# EAGLE board main_V3 (EAGLE 8.5.1)

Size 50.47 x 31.74 mm. Coordinates in mm from the lower left corner, seen from the top.
Outline: 0,0 50.47,0 50.47,31.74 0,31.74 0,0
Copper layers ((1*2)+(15*16)): Top 0.035mm / dielectric 1.5mm / Route2 0.035mm / dielectric 0.15mm / Route15 0.035mm / dielectric 0.2mm / Bottom 0.035mm
Design rules "default *": minimum track width 16mil, minimum drill 0.35mm, track to track 6mil, track to pad 6mil, pad to pad 6mil, via to via 6mil, smd to smd 6mil, copper to edge 40mil, drill to drill 6mil, minimum pad ring 10mil, minimum via ring 8mil, stop-mask expansion 4mil, vias tented up to drill 0mil, thermal gap 10mil

## Footprints (pad centres in the part's own frame; a part is rotated, then mirrored left to right if it is on the bottom)
DBS = smd 1.7 x 1.9: + -2.55,-4.5; - 2.55,-4.5; AC1 -2.55,4.5; AC2 2.55,4.5
C1206K = smd 1.5 x 2: 1 -1.5,0; 2 1.5,0
SOT23 = smd 1 x 1.4: 1 -0.95,-1.1; 2 0.95,-1.1; 3 0,1.1
SMADIODE = smd 2.54 x 2.54: A 2.349,0; C -2.349,0
SOT223 = smd 1.499 x 2.007: 1 -2.261,-3.15; 2 0.025,-3.15; 3 2.311,-3.15 | smd 3.81 x 2.007: 4 0,3.15
1206 = smd 1.6 x 1.803: A -1.422,0; C 1.422,0
SO8P = smd 0.61 x 2.21: 1 -1.905,-2.616; 2 -0.635,-2.616; 3 0.635,-2.616; 4 1.905,-2.616; 5 1.905,2.616; 6 0.635,2.616; 7 -0.635,2.616; 8 -1.905,2.616
5-2,5 = smd 2.54 x 5.08: 1 0,0
SMD1,27-2,54 = smd 1.27 x 2.54: 1 0,0
CSM-7X-DU = smd 5.5 x 2: 1 -4.75,0; 2 4.75,0
SOT23-3 = smd 0.8 x 0.9: 1 -0.95,-1; 2 0.95,-1; 3 0,1.1
1206' = smd 1.6 x 1.8: 1 -1.4,0; 2 1.4,0
ESP8266-ESP12E = smd 2 x 1.2: 1 -7.62,5.84; 2 -7.62,3.84; 3 -7.62,1.84; 4 -7.62,-0.16; 5 -7.62,-2.16; 6 -7.62,-4.16; 7 -7.62,-6.16; 8 -7.62,-8.16; 9 8.58,-8.16; 10 8.58,-6.16; 11 8.58,-4.16; 12 8.58,-2.16; 13 8.58,-0.16; 14 8.58,1.84; 15 8.58,3.84; 16 8.58,5.84 | smd 1.2 x 2: 17 -4.62,-10.16; 18 -2.62,-10.16; 19 -0.62,-10.16; 20 1.38,-10.16; 21 3.38,-10.16; 22 5.38,-10.16
SOT23-BEC = smd 1 x 1.4: B -0.95,-1.1; C 0,1.1; E 0.95,-1.1
TQFP32-08 = smd 1.27 x 0.559: 1 -4.293,2.8; 2 -4.293,2; 3 -4.293,1.2; 4 -4.293,0.4; 5 -4.293,-0.4; 6 -4.293,-1.2; 7 -4.293,-2; 8 -4.293,-2.8; 17 4.293,-2.8; 18 4.293,-2; 19 4.293,-1.2; 20 4.293,-0.4; 21 4.293,0.4; 22 4.293,1.2; 23 4.293,2; 24 4.293,2.8 | smd 0.559 x 1.27: 9 -2.8,-4.293; 10 -2,-4.293; 11 -1.2,-4.293; 12 -0.4,-4.293; 13 0.4,-4.293; 14 1.2,-4.293; 15 2,-4.293; 16 2.8,-4.293; 25 2.8,4.293; 26 2,4.293; 27 1.2,4.293; 28 0.4,4.293; 29 -0.4,4.293; 30 -1.2,4.293; 31 -2,4.293; 32 -2.8,4.293
SOIC16 = smd 0.635 x 1.524: 1 -4.445,-2.695; 2 -3.175,-2.695; 3 -1.905,-2.695; 4 -0.635,-2.695; 5 0.635,-2.695; 6 1.905,-2.695; 7 3.175,-2.695; 8 4.445,-2.695; 9 4.445,2.695; 10 3.175,2.695; 11 1.905,2.695; 12 0.635,2.695; 13 -0.635,2.695; 14 -1.905,2.695; 15 -3.175,2.695; 16 -4.445,2.695
47589-0001 = smd 1.35 x 0.4: 1 2.8,1.3; 2 2.8,0.65; 3 2.8,0; 4 2.8,-0.65; 5 2.8,-1.3 | smd 1.27 x 2.54: P$1 0,3.81; P$2 0,-3.81

## Placement (x,y rotation side)
B1  DBS107G  [DBS]  35.56,12.7 90 bottom
C1  100nf  [C1206K]  45.09,15.88 0 bottom
C2  100nf  [C1206K]  43.81,3.17 270 bottom
C3  100nf  [C1206K]  38.1,25.4 0 bottom
C4  22pf  [C1206K]  37.47,10.79 90 top
C5  22pf  [C1206K]  37.47,15.88 270 top
C6  100nf  [C1206K]  40.01,12.7 270 top
C7  22pf  [C1206K]  11.43,6.98 90 bottom
C8  22pf  [C1206K]  9.53,20.32 180 bottom
C9  100f  [C1206K]  24.77,11.43 0 bottom
C10  100nf  [C1206K]  3.49,1.59 180 top
C11  100nf  [C1206K]  4.45,22.86 270 bottom
C12  10uf  [C1206K]  4.45,28.57 270 bottom
C13  10uf  [C1206K]  26.03,1.91 0 bottom
C14  10uf  [C1206K]  24.77,13.97 0 bottom
C15  10uf  [C1206K]  33.02,8.89 0 top
C17  10uf  [C1206K]  21.59,24.77 270 bottom
D1  6v2  [SOT23]  38.1,21.59 90 bottom
D2  [SMADIODE]  33.66,2.54 0 top
IC1  1117-adj  [SOT223]  45.72,10.79 90 bottom
IC2  1117-3v3  [SOT223]  45.72,22.86 90 bottom
IC3  1117-5v  [SOT223]  8.89,26.04 0 bottom
IC4  1117-5v  [SOT223]  26.67,6.35 90 bottom
IC5  1117-3v3  [SOT223]  27.31,19.05 90 bottom
IC6  1117-5v  [SOT223]  27.31,26.04 90 bottom
LED1  [1206]  38.1,28.57 0 bottom
LED2  [1206]  32.39,6.35 180 top
LED3  [1206]  40.01,26.04 180 top
M1  [SO8P]  15.88,24.13 180 bottom
PAD1  [5-2,5]  47.62,27.94 0 bottom
PAD2  [5-2,5]  33.66,27.94 180 bottom
PAD3  [SMD1,27-2,54]  13.97,1.91 0 bottom
PAD4  [5-2,5]  36.83,3.81 180 bottom
PAD5  [5-2,5]  40.64,3.81 180 bottom
PAD6  [5-2,5]  33.02,3.81 180 bottom
PAD7  [SMD1,27-2,54]  2.54,23.5 90 top
PAD8  [SMD1,27-2,54]  2.54,13.97 90 top
PAD9  [SMD1,27-2,54]  2.54,12.06 90 top
PAD10  [SMD1,27-2,54]  2.54,10.16 90 top
PAD11  [SMD1,27-2,54]  2.54,8.26 90 top
PAD12  [SMD1,27-2,54]  2.54,19.68 90 top
PAD13  [SMD1,27-2,54]  2.54,21.59 90 top
PAD14  [SMD1,27-2,54]  2.54,15.88 90 top
PAD15  [SMD1,27-2,54]  2.54,17.78 90 top
PAD16  [SMD1,27-2,54]  2.54,6.35 90 top
PAD17  [SMD1,27-2,54]  2.54,4.45 90 top
PAD18  [SMD1,27-2,54]  13.97,29.84 180 bottom
PAD19  [SMD1,27-2,54]  12.07,29.84 180 bottom
PAD20  [SMD1,27-2,54]  21.59,29.84 0 bottom
PAD21  [SMD1,27-2,54]  19.69,29.84 0 bottom
PAD22  [SMD1,27-2,54]  17.78,29.84 0 bottom
PAD23  [SMD1,27-2,54]  12.07,1.91 0 bottom
PAD24  [SMD1,27-2,54]  10.16,1.91 0 bottom
PAD25  [SMD1,27-2,54]  8.26,1.91 0 bottom
PAD26  [SMD1,27-2,54]  6.35,1.91 0 bottom
PAD27  [SMD1,27-2,54]  4.45,1.91 0 bottom
PAD28  [SMD1,27-2,54]  1.91,27.94 270 bottom
PAD29  [SMD1,27-2,54]  1.91,29.84 270 bottom
PAD30  [SMD1,27-2,54]  1.91,1.27 90 bottom
PAD31  [SMD1,27-2,54]  1.91,3.17 90 bottom
PAD32  [SMD1,27-2,54]  1.91,5.08 90 bottom
PAD33  [SMD1,27-2,54]  1.91,6.98 90 bottom
PAD34  [SMD1,27-2,54]  1.91,8.89 90 bottom
PAD37  [SMD1,27-2,54]  1.91,14.61 270 bottom
PAD38  [SMD1,27-2,54]  1.91,16.51 270 bottom
PAD40  [SMD1,27-2,54]  1.91,20.32 270 bottom
PAD41  [SMD1,27-2,54]  1.91,22.22 270 bottom
PAD42  [SMD1,27-2,54]  1.91,24.13 270 bottom
PAD43  [SMD1,27-2,54]  1.91,26.04 270 bottom
Q1  12Mhz  [CSM-7X-DU]  33.02,18.41 90 top
Q2  [SOT23-3]  20.32,2.54 0 bottom
Q3  16Mhz  [CSM-7X-DU]  7.62,11.43 90 bottom
Q4  [SOT23-3]  16.51,2.54 0 bottom
R1  10K  [1206']  26.67,19.68 0 top
R2  10K  [1206']  26.67,22.22 0 top
R3  10K  [1206']  26.67,1.91 0 top
R4  10K  [1206']  26.67,6.98 0 top
R5  10  [1206']  48.9,3.17 270 bottom
R6  1K  [1206']  45.09,18.41 0 bottom
R7  1K  [1206']  43.18,28.57 0 bottom
R8  10  [1206']  46.36,3.17 270 bottom
R9  10K  [1206']  26.67,4.45 180 top
R10  10K  [1206']  42.55,19.68 180 top
R11  10K  [1206']  13.97,6.98 270 bottom
R12  1K  [1206']  37.47,6.35 180 top
R13  10K  [1206']  42.55,22.22 0 top
R14  470  [1206']  26.67,17.14 0 top
R15  470  [1206']  26.67,14.61 0 top
R16  10K  [1206']  26.67,12.06 0 top
R17  10K  [1206']  16.51,6.98 90 bottom
R18  10K  [1206']  26.67,9.53 0 top
R19  10K  [1206']  19.05,6.98 90 bottom
R20  10K  [1206']  26.67,24.77 0 top
R21  10K  [1206']  3.18,26.67 0 top
R22  1K  [1206']  46.36,26.04 180 top
SJR1  [ESP8266-ESP12E]  13.97,12.7 0 top
T1  [SOT23-BEC]  47.62,20.95 0 top
T2  [SOT23-BEC]  37.47,20.95 0 top
U1  ATMEGA328P_TQFP  [TQFP32-08]  15.88,14.61 180 bottom
U$1  CH340G  [SOIC16]  45.09,12.7 270 top
U$2  MICRO-USB  [47589-0001]  44.2,3.17 90 top

## Library data of the parts
B1 = rectifier
C1-C15 C17 = rcl; SPICEPREFIX: C
D1 = diode
D2 LED1-LED3 = adafruit
IC1-IC6 = burr-brown; MPN: REG1117; OC_FARNELL: 1097566; OC_NEWARK: 14P6981
M1 = FaBo-Motor
PAD1-PAD34 PAD37 PAD38 PAD40-PAD43 = wirepad
Q1 Q3 = crystal; OC_FARNELL: unknown; OC_NEWARK: unknown
Q2 Q4 = SparkFun-DiscreteSemi; PROD_ID: TRANS-00830
R1-R22 = SparkFun
SJR1 = esp12e
T1 T2 = DC_LOAD_AU
U1 = SparkFun-IC-Microcontroller; PROD_ID: IC-09069
U$1 = ch340g
U$2 = con-molex-usb

## Nets
0: PAD30.1 U1.30
1: PAD31.1 U1.31
2: PAD32.1 U1.32
3: PAD33.1 U1.1
3V3: C10.1 C14.1 IC5.2 Q2.1 Q4.1 R1.1 R2.1 R4.2 R9.1 R16.2 R18.2 SJR1.8
4: PAD34.1 U1.2
5_REVERSE: M1.7 U1.9
5V: C9.1 C13.1 D2.C IC4.2 R11.2 R17.1 R19.1 U1.4 U1.6 U1.18 U$1.16
5V_M: C11.1 C12.1 IC3.2 M1.2 M1.3
5V_S: C17.1 IC6.2 PAD20.1
6_FORWARD: M1.6 U1.10
7: PAD37.1 U1.11
8: PAD38.1 U1.12
9_SERVO: PAD22.1 U1.13
10: PAD40.1 U1.14
11: PAD41.1 U1.15
12: PAD42.1 U1.16
13: PAD43.1 U1.17
+12V: C3.1 IC2.3 PAD1.1 R7.1 R22.1
-12V: B1.AC2 C1.2 C2.2 C3.2 D1.1 LED1.C LED3.C PAD2.1
-VBAT: B1.- PAD5.1
A0: PAD3.1 U1.23
A1: PAD23.1 U1.24
A2: PAD24.1 U1.25
A3: PAD25.1 U1.26
A6: PAD28.1 U1.19
A7: PAD29.1 U1.22
ADC: PAD7.1 R21.1
D+: U$1.5 U$2.3
D-: U$1.6 U$2.2
DTR: R10.2 T2.E U$1.13
E_0: PAD8.1 SJR1.4
E_2: PAD11.1 SJR1.7
E_3: PAD10.1 SJR1.6
E_5: PAD9.1 SJR1.5
E_8: PAD16.1 R3.1 SJR1.10
E_ADC: R20.1 R21.2 SJR1.2
GND: C4.2 C5.2 C6.2 C7.2 C8.2 C9.2 C10.2 C11.2 C12.2 C13.2 C14.2 C15.1 C17.2 IC3.1 IC4.1 IC5.1 IC6.1 LED2.C M1.5 M1.8 PAD6.1 PAD17.1 PAD21.1 R3.2 R20.2 SJR1.9 U1.3 U1.5 U1.21 U$1.1 U$2.5 U$2.P$2
IO0: R4.1 SJR1.12 T2.C
IO2: R9.2 SJR1.11
M+: M1.1 PAD18.1
M-: M1.4 PAD19.1
N$1: C7.1 Q3.1 U1.8
N$2: R2.2 SJR1.3
N$3: D1.3 IC2.1 R6.2
N$5: B1.AC1 C2.1 IC1.1 R5.2 R8.2
N$6: IC1.2 R5.1 R8.1
N$7: C1.1 IC1.3 IC2.2 R6.1
N$13: C4.1 Q1.1 U$1.8
N$14: C5.1 Q1.2 U$1.7
N$15: R10.1 T1.B
N$16: C8.1 Q3.2 U1.7
N$17: LED1.A R7.2
N$18: R13.1 T2.B
N$19: R15.2 U$1.3
N$20: R14.2 U$1.2
N$21: R11.1 U1.29
N$22: LED2.A R12.2
N$23: LED3.A R22.2
NRST: R1.2 SJR1.1 T1.C
RTS: R13.2 T1.E U$1.14
RX: PAD12.1 R14.1 SJR1.15
SCL3: PAD15.1 Q4.2 R16.1 SJR1.14
SCL5: PAD27.1 Q4.3 R17.2 U1.28
SDA3: PAD14.1 Q2.2 R18.1 SJR1.13
SDA5: PAD26.1 Q2.3 R19.2 U1.27
TX: PAD13.1 R15.1 SJR1.16
V3: C6.1 U$1.4
VBAT: B1.+ IC3.3 IC4.3 IC5.3 IC6.3 PAD4.1
VCC: C15.2 D2.A R12.1 U$2.1

## Tracks (layer width: path | path; a pad name or v marks a point on that pad's centre or on a via)
0  (1 unrouted)
1  (1 unrouted)
2  (1 unrouted)
3  (1 unrouted)
3V3  (11 unrouted)
4  (1 unrouted)
5_REVERSE  (1 unrouted)
5V  (10 unrouted)
5V_M  (4 unrouted)
5V_S  (2 unrouted)
6_FORWARD  (1 unrouted)
7  (1 unrouted)
8  (1 unrouted)
9_SERVO  (1 unrouted)
10  (1 unrouted)
11  (1 unrouted)
12  (1 unrouted)
13  (1 unrouted)
+12V  (4 unrouted)
-12V  (7 unrouted)
-VBAT  (1 unrouted)
A0  (1 unrouted)
A1  (1 unrouted)
A2  (1 unrouted)
A3  (1 unrouted)
A6  (1 unrouted)
A7  (1 unrouted)
ADC  (1 unrouted)
D+  (1 unrouted)
D-  (1 unrouted)
DTR  (2 unrouted)
E_0  (1 unrouted)
E_2  (1 unrouted)
E_3  (1 unrouted)
E_5  (1 unrouted)
E_8  (2 unrouted)
E_ADC  (2 unrouted)
GND  (31 unrouted)
IO0  (2 unrouted)
IO2  (1 unrouted)
M+  (1 unrouted)
M-  (1 unrouted)
N$1  (2 unrouted)
N$2  (1 unrouted)
N$3  (2 unrouted)
N$5  (4 unrouted)
N$6  (2 unrouted)
N$7  (3 unrouted)
N$13  (2 unrouted)
N$14  (2 unrouted)
N$15  (1 unrouted)
N$16  (2 unrouted)
N$17  (1 unrouted)
N$18  (1 unrouted)
N$19  (1 unrouted)
N$20  (1 unrouted)
N$21  (1 unrouted)
N$22  (1 unrouted)
N$23  (1 unrouted)
NRST  (2 unrouted)
RTS  (2 unrouted)
RX  (2 unrouted)
SCL3  (3 unrouted)
SCL5  (3 unrouted)
SDA3  (3 unrouted)
SDA5  (3 unrouted)
TX  (2 unrouted)
V3  (1 unrouted)
VBAT  (5 unrouted)
VCC  (3 unrouted)